# Altium PCB FC_Ver_0_2.PcbDoc
Units mil, origin at the board's own origin, x right, y up, seen from the top; angles counter-clockwise.
Board outline 2440.94 x 3464.57 mil, 2 copper layers (Top Layer, Bottom Layer); 26 components, 24 nets, 114 pads, 10 vias.
Unrouted connection lines stored in the file: 33.
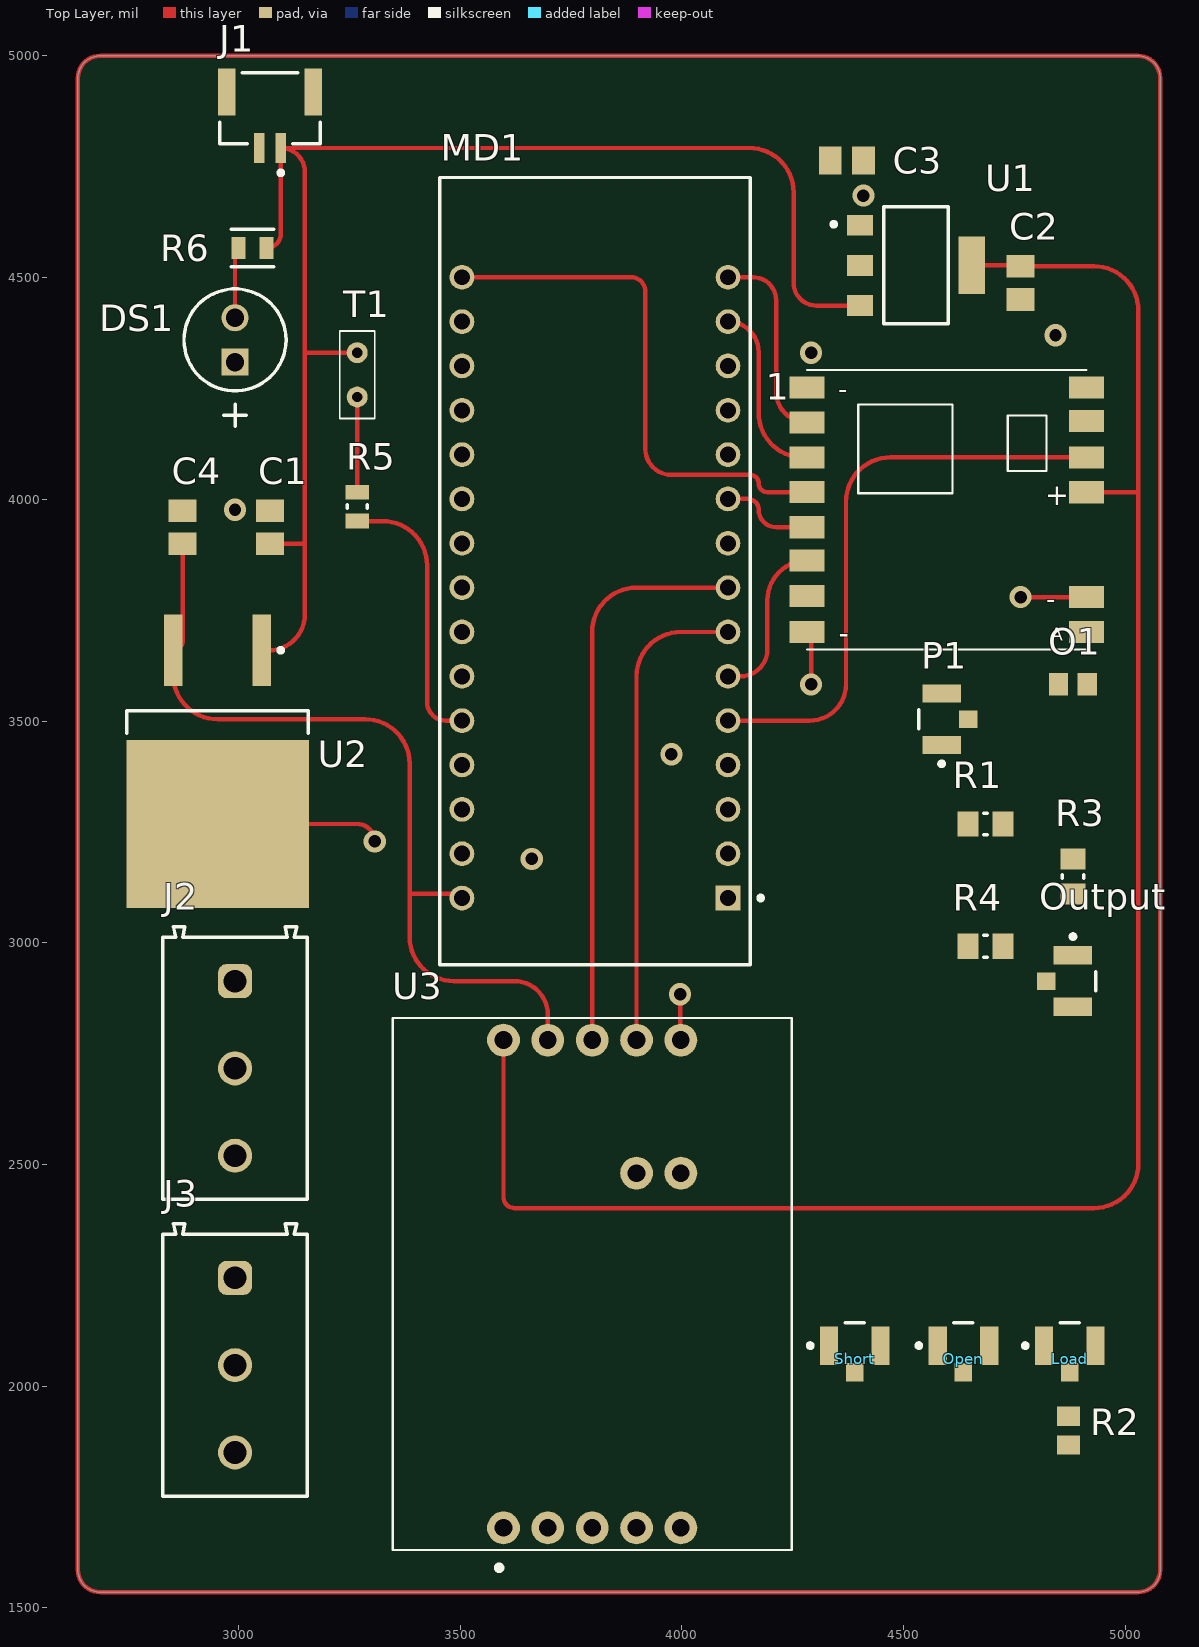
[diagram p0: Top Layer view]
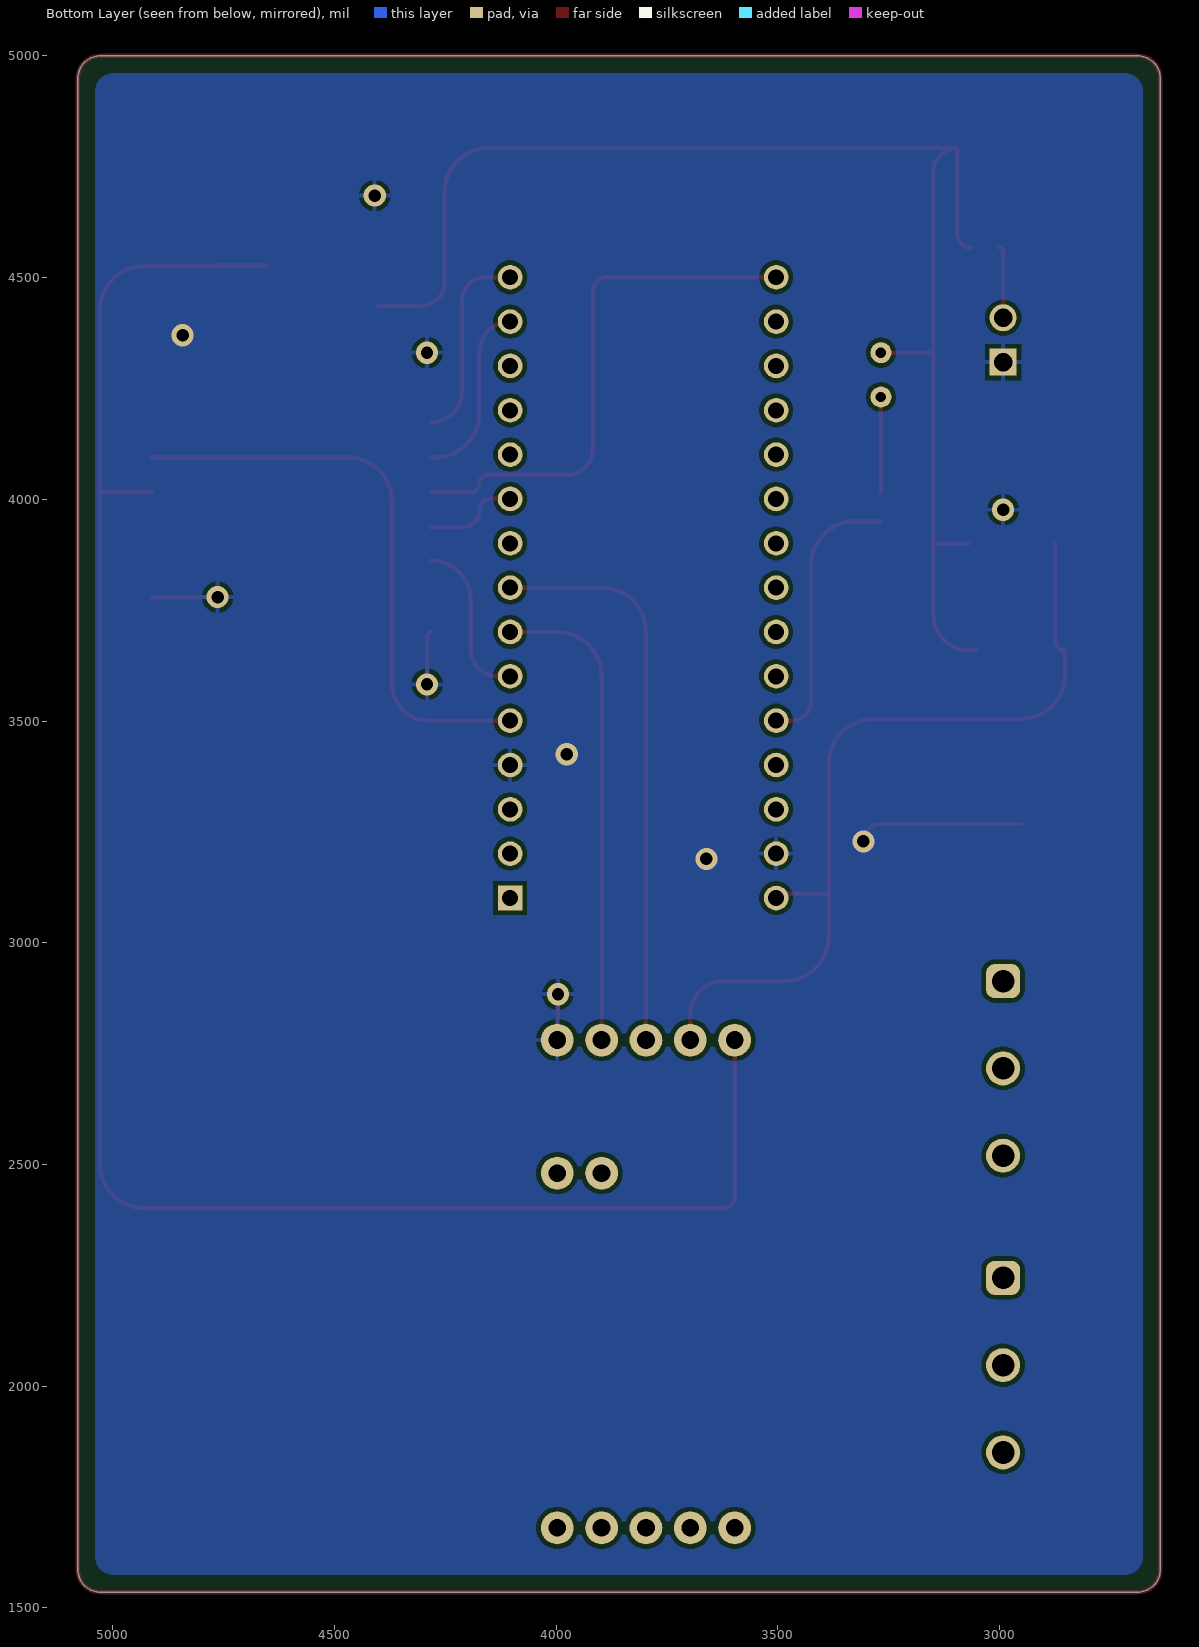
[diagram p1: Bottom Layer view, seen from below]

## Layer stack, top to bottom
Top Solder: solder mask 0.4, Solder Resist, Dk 3.5
Top Layer: signal copper 1.4
Dielectric 1: dielectric 12.6, FR-4, Dk 4.8
Bottom Layer: signal copper 1.4
Bottom Solder: solder mask 0.4, Solder Resist, Dk 3.5

## Board outline
2637.8,1585.43 ccw(c2687.8,1585.43) 2687.8,1535.43 5028.74,1535.43 ccw(c5028.74,1585.43) 5078.74,1585.43 5078.74,4950 ccw(c5028.74,4950) 5028.74,5000 2687.8,5000 ccw(c2687.8,4950) 2637.8,4950

## Design rules (kind name [scope] priority, off if disabled: settings)
Clearance [All] p1: gap=10 ignorepadtopadclearanceinfootprint=FALSE
PolygonConnect [All] p1: connectstyle=Relief reliefconductorwidth=10 reliefentries=4 polygonreliefangle="90 Angle" airgapwidth=10
RoutingVias [All] p1: holewidth=28 width=50 viastyle="Through Hole" minholewidth=28 minwidth=50 maxholewidth=28 maxwidth=50
SolderMaskExpansion [All] p1: expansion=4 istentingtop=FALSE
SupplyNets "Schematic Supply Nets_3" [InNet('+3.3v')] p1: voltage=0.000
SupplyNets "Schematic Supply Nets_2" [InNet('+12')] p2: voltage=0.000
SupplyNets "Schematic Supply Nets_1" [InNet('+5v')] p3: voltage=0.000
SupplyNets "Schematic Supply Nets" [InNet('GND')] p4: voltage=0.000
Width [All] p1: maxlimit=10 minlimit=10 preferedwidth=10
30 further rules are at their usual default settings.

## Components (designator, comment, footprint, x,y, rotation, side; value= is the part's Value field where it differs from the comment)
1 "_C2H_RFM95" _C2H_RFM95 4685.04,3976.38 r0 top
C1 "100nF" RCL_M0805 3070.87,3937.01 r270 top
C2 "10uF" RCL_M0805 4763.78,4488.19 r90 top
C3 "0.33uF" RCL_M0805 4372.05,4763.78 r0 top
C4 "0.1uF" RCL_M0805 2874.02,3937.01 r90 top
DS1 "HLMP-3301" AVAG-HLMP-3301-2 2992.13,4309.45 r90 top
J1 "SM02B-GHS-TB(LF)(SN)" FP-SM02B-GHS-TB_LF_SN-MFG 3070.87,4881.89 r180 top
J2 "691213710003" 691213710003 2992.13,2716.54 r270 top
J3 "691213710003" 691213710003 2992.13,2047.24 r270 top
Load "Load" HRS-U.FL-R-SMT-3_V 4874.76,2091.34 r0 top
MD1 "A000005" FP-A000005-MFG 3803.94,3838.29 r180 top
O1 "0805" RESC2012X06N 4881.89,3582.68 r0 top
Open "Open" HRS-U.FL-R-SMT-3_V 4634.76,2091.34 r0 top
Output "U.FL-R-SMT-1(01)" HRS-U.FL-R-SMT-3_V 4881.89,2913.39 r270 top
P1 "Tune Side" HRS-U.FL-R-SMT-3_V 4585.63,3503.94 r90 top
R1 "RC0805FR-071KL" RESC2013X60X35ML10T20 4685.04,3267.72 r0 top
R2 "0805" RESC2012X06N 4872.05,1899.61 r90 top
R3 "RC0805FR-071KL" RESC2013X60X35ML10T20 4881.89,3149.61 r90 top
R4 "RC0805FR-071KL" RESC2013X60X35ML10T20 4685.04,2992.13 r0 top
R5 "CRCW08050000Z0EA" RESC2013X50X30LL20T20 3267.72,3983.27 r90 top
R6 "RC0805FR-07100KL" FP-RC0805-0_6-IPC_C 3031.5,4566.93 r180 top
Short "Short" HRS-U.FL-R-SMT-3_V 4389.76,2091.34 r0 top
T1 "GenericTH" "Generic Two Pin Connector" 3267.72,4330.71 r270 top
U1 "LD1117S33CTR" FP-SOT-223-0046067_14-MFG 4527.56,4527.56 r0 top
U2 "L7805CD2T-TR" TO-263_M 2952.76,3409.45 r270 top
U3 "SEN-13879" SPARKFUN_SEN-13879 3797.64,2230.32 r90 top

## Footprints (in the part's own frame and the unit in brackets; to place one, negate y for a bottom-side part, rotate by r counter-clockwise, add the part's x,y. Pads: shape width x height; smd on the part's side, far side on the other; paste and mask are expansions set on the pad)
691213710003 [mm] "5,00mm - modular - green - Horizontal entry with rising cage clamp -  10,0mm height - 03p"
  rrect50% 1.95x1.95 hole 1.3: 1(-5,0)
  round 1.95 hole 1.3: 2(0,0) 3(5,0)
  silkscreen extent -8.1,-4.15 7.5,4.15, body extent -8.1,-4.15 7.5,4.15, height 10.05
_C2H_RFM95 [mm]
  rect 2x1.27 smd: ANT(5.777,-7) DIO0(5.777,3) DIO1(5.78,5.095) DIO2(5.78,7) DIO5(-10.225,-4.936) GND(5.777,-5) GND1(-10.222,7) GND2(-10.23,-7) MISO(-10.23,5) MOSI(-10.225,3) NSS(-10.222,-1) RST(-10.222,-2.905) SCK(-10.23,1.012) VDD(5.777,1)
  silkscreen extent -10.23,-8 5.78,8
AVAG-HLMP-3301-2 [mm] "THD, 2-Leads, Body Dia 5.85mm"
  rect 1.55x1.55 hole 1.05: 1(0,0)
  round 1.55 hole 1.05: 2(2.54,0)
  silkscreen extent -3.68,-2.92 4.19,2.92
FP-A000005-MFG [mil]
  rect 55.67x55.67 hole 35.98 paste-99999 mask+0: 1(-300,737.5)
  round 55.67 hole 35.98 paste-99999 mask+0: 2(-300,637.5) 3(-300,537.5) 4(-300,437.5) 5(-300,337.5) 6(-300,237.5) 7(-300,137.5) 8(-300,37.5) 9(-300,-62.5) 10(-300,-162.5) 11(-300,-262.5) 12(-300,-362.5) 13(-300,-462.5) 14(-300,-562.5) 15(-300,-662.5) 16(300,-662.5) 17(300,-562.5) 18(300,-462.5) 19(300,-362.5) 20(300,-262.5) 21(300,-162.5) 22(300,-62.5) 23(300,37.5) 24(300,137.5) 25(300,237.5) 26(300,337.5) 27(300,437.5) 28(300,537.5) 29(300,637.5) 30(300,737.5)
  silkscreen extent -379,-888 350,888, body extent -354,-891 354,891, height 10
FP-RC0805-0_6-IPC_C [mil]
  rect 31.82x49.69 smd paste+0 mask+0: 1(-31.57,0) 2(31.57,0)
  silkscreen extent -47,-42 47,42, body extent -51,-31 51,31, height 10
FP-SM02B-GHS-TB_LF_SN-MFG [mm]
  rect 0.6x1.7 smd paste+0 mask+0: 1(-0.625,2.275) 2(0.625,2.275)
  rect 1x2.7 smd paste+0 mask+0: 3(-2.475,-0.925) 4(2.475,-0.925)
  silkscreen extent -2.88,-2.02 2.88,3.82, body extent -3.08,-2.37 3.08,3.22, height 0.25
FP-SOT-223-0046067_14-MFG [mm]
  rect 1.5x1.2 smd paste+0 mask+0: 1(-3.2,2.3) 2(-3.2,0) 3(-3.2,-2.3)
  rect 1.5x3.3 smd paste+0 mask+0: 4(3.2,0)
  silkscreen extent -4.82,-3.35 1.85,3.35, body extent -4.05,-3.45 4.05,3.45, height 0.25
"Generic Two Pin Connector" [mm]
  round 1.2 hole 0.6: 1(0,0) 2(2.54,0)
  silkscreen extent -1.23,-1 3.77,1
HRS-U.FL-R-SMT-3_V [mm] "SMT, 3-Leads, Body 2.6x2.6mm"
  rect 1.05x2.2 smd: 1(-1.475,0) 2(1.475,0)
  rect 1x1.05 smd: 3(0,-1.525)
  silkscreen extent -2.67,-0.12 0.55,1.3, body extent -1.3,-1.3 1.3,1.3, height 1.25
RCL_M0805 [mil]
  rect 51.18x62.99 smd: 1(-37.4,0) 2(37.4,0)
RESC2012X06N [mm] "Chip Resistor, 2-Leads, Body 2.00x1.25mm, IPC Medium Density"
  rect 1.1x1.3 smd: 1(-0.825,0) 2(0.825,0)
  body extent -1,-0.63 1,0.63, height 0.6
RESC2013X50X30LL20T20 [mm] "Chip Resistor, 2-Leads, Body 2.00x1.25mm, IPC High Density"
  rect 0.85x1.35 smd: 1(-0.825,0) 2(0.825,0)
  silkscreen extent -0.1,-0.58 0.1,0.58, body extent -1.1,-0.72 1.1,0.72, height 0.5
RESC2013X60X35ML10T20 [mm] "Chip Resistor, 2-Leads, Body 2.1x1.35mm, IPC Low Density"
  rect 1.2x1.45 smd: 1(-1,0) 2(1,0)
  silkscreen extent -0.1,-0.63 0.1,0.63, body extent -1.05,-0.68 1.05,0.67, height 0.6
SPARKFUN_SEN-13879 [mil]
  round 74 hole 40: 1(-550,200) 2(-550,100) 3(-550,0) 4(-550,-100) 5(-550,-200) 6(550,-200) 7(550,-100) 8(550,0) 9(550,100) 10(550,200) 11(250,-100) 12(250,-200)
  silkscreen extent -646,-450 600,450
TO-263_M [mm] "D2-PAK, 4-Leads, Body 9.2x10.2mm, Pitch 2.54mm, Lead Span 15.4mm, IPC Low Density"
  rect 4.1x1.05 smd: 1(-6.35,2.54) 3(-6.35,-2.54)
  rect 9.6x10.45 smd: 4(3.6,0)
  silkscreen extent -6.47,-5.2 -1.6,5.2, body extent -2.9,-5.2 6.45,5.2, height 4.6

## Part data
C1 C2 C3 C4: library part RCL_R-EU_M0805, Package=RCL_M0805, DeviceName=M0805, DeviceSetName=RCL_R-EU_, GateName_1=G$1, LibraryName=AmbaSat-1v1-01-NO-solar, SymbolName_1=RCL_R-EU
DS1: library part CMP-2000-06411-1, "T-1 3/4 (5 mm) Diffused LED Lamp, 1.9 V, -40 to 100 degC, 2-Pin THD, RoHS, Bulk", Emitting Color=Red, Forward Current=25mA, Forward Voltage=2.4V, Manufacturer=Avago, Operating Temp Range=-40Cto100C, Operating Temperature Classification=Industrial, Package Description="2-Pin Through Hole LED, Dia 5.85 mm", Package Type=T-13/4, Power Dissipation=85W, Reverse Voltage=5V, Test Current (It)=10mA, Chip Material=GaP, Datasheet URL=http://www.avagotech.com/docs/AV02-1558EN, Datasheet Version=03/2015, DELETED=Compliant, Dominant Wave Length=626nm, High Brightness=No, Lens Dimensions=5.08x5.08x8.3mm, Lens Type=ColoredDiffused, Lum Intensity=5.4mcd, Luminous Intensity=5.4mcd, Main Category=StandardLED, Manufacturer URL=http://www.avagotech.com/, Mounting=ThroughHole, Mounting Technology=ThroughHole, Number of  Elements=1, Package Reference=HLMP-3301, Packaging=TapeandReel, Peak Wavelength=635nm, Pin Count=2, Product Depth (mm)=6.1mm, Product Height (mm)=9.19mm, Product Length (mm)=6.1mm, Rad Hardened=No, Shape Type=Circular, Type=Uni-Color, Viewing Angle=60deg
J1: library part CMP-2000-07076-2, "CONN HEADER SMD R/A 2POS 1.25MM", Color=Natural, Current Rating=1A, Package Quantity=2500, Voltage Rating=50V, Connector Type="Outer Shroud Contact", Contact Material=Bronze, Contact Plating=Tin, Contact Type="Male Pin", Fastening Type=Latch, Housing Color=Natural, Housing Material=Nylon, Lead Free="Lead Free", Mount="Surface Mount", Number of Contacts=2, Number of Positions=2, Number of Rows=1, Orientation="Right Angle", Packaging="Tape and Reel", Pitch=0.049inch, Series=GH, Termination=Solder
J2 J3: library part CMP-1502-02527-2, Color=Green, Current=10A, Max Operating Temperature=105°C, Min Operating Temperature=-40°C, Voltage=300V, Connector Type="PCB, Terminal Block", Contact Material=Brass, Contact Plating=Tin, Height=10mm, Housing Material=Nylon, Lead Pitch=5mm, Length=8.3mm, Mount="Through Hole", NexarPartId=8917719, Number of Contacts=3, Number of Levels=1, Number of Pins=3, Number of Positions Per Level=3, Packaging=Box, Pitch=5.0038mm, Plating="Brass, Steel", REACH SVHC=Unknown, RoHS=Compliant, Stripping Length=-7mm, Termination=Screw, Width=15.6mm, Wire Gauge (Max)=26AWG, Wire Gauge (Min)=16AWG, Wire/Cable Gauge=16AWG
Load Open Output P1 Short: library part CMP-2000-05153-1, "Ultra Small Coaxial Connector, 6 GHz, -40 to 90 degC, 3-Pin SMD, RoHS, Bulk", Dielectric Material=LiquidCrystalPolymer(LCP), Frequency - Max=6GHz, Housing Color=Silver, Manufacturer="Hirose Electric", Operating Temperature=-40degC~90degC, Package Description="3-Pin Surface Mount Device, Body 2.6 x 2.6 mm", Package Reference=U.FL-R-SMT, Standard Package=100, Body Finish=Silver, Body Material=PhosphorBronze, Category=Connectors,Interconnects, Center Contact Material=PhosphorBronze, Center Contact Plating=Gold, Connector Style=U.FL, Connector Type=Jack,MalePin, Contact Termination=Solder, Datasheet URL=https://datasheet.ciiva.com/26945/getdatasheetpartid-475239-26945414.pdf, Datasheet Version=Feb-09, Dynamic Catalog=U.FLSeries, Family=CoaxialConnectors(RF), Fastening Type=Snap-On, Featured Product=HiroseU.FLSeries, Impedance=50Ohm, Manufacturer URL=https://www.hirose.com, Minimum Quantity=UltraMiniatureCoaxial, Mounting Type=SurfaceMount, Online Catalog=U.FLSeries, Other Names="H122041 / U.FL-R-SMT-1(01)-ND", Packaging=Bulk, Quantity Available=Bulk, Series=U.FL, Shield Termination=Solder, Unit PriceUSD=U.FL
MD1: library part CMP-189986-000002-1, "ARDUINO NANO ATMEGA328 EVAL BRD", Operating Supply Voltage=12V, Package Quantity=50, Core Architecture=AVR, Data Bus Width=8b, Evaluation Kit=Yes, Height=0.25inch, Interface=I2C, Length=7inch, Number of Bits=8, Packaging=Bulk, REACH SVHC="No SVHC", Series="AVR® ATmega", Weight=0.358383oz, Width=5inch
R1 R3 R4: library part CMP-2100-03671-1, "Chip Resistor, 1 KOhm, +/- 1%, 125 mW, -55 to 155 degC, 0805 (2012 Metric), RoHS, Tape and Reel", Case Code (Imperial)=0805, Case Code (Metric)=2012, Manufacturer=Yageo, Max Operating Temperature=155degC, Max Power Dissipation=125mW, Min Operating Temperature=-55degC, Package Description="2-Pin Surface Mounted Device, Body 2 x 1.25 mm", Package Quantity=1, Resistance=1KOhm, Temperature Coefficient=100ppm/degreesC, Tolerance=1%, Voltage Rating=150V, Case/Package=0805, Composition=ThickFilm, Datasheet URL=http://www.yageo.com/NewPortal/yageodocoutput?fileName=/pdf/R-Chip/PYu-RC_Group_51_RoHS_L_5.pdf, Datasheet Version="Rev. 5, 10/2016", Depth=1.25mm, Height=0.024inch, Lead Free=LeadFree, Length=0.079inch, Manufacturer URL=http://www.yageo.com/, Military Standard=Not, Number of Pins=2, Number of Terminations=2, Package Reference=0805, Packaging=TapeandReel, Power Rating=125mW, REACH SVHC=Unknown, RoHSCompliant=true, Termination=SMD/SMT, Voltage Rating (DC)=150V, Width=0.049inch
R5: library part CMP-2001-04896-1, Manufacturer="Vishay Dale", Part Number=CRCW08050000Z0EA
R6: library part CMP-2100-03668-5, "RES 100K OHM 1% 1/8W 0805", Case Code (Imperial)=0805, Case Code (Metric)=2012, Max Operating Temperature=155°C, Max Power Dissipation=125mW, Min Operating Temperature=-55°C, Package Quantity=1, Resistance=100kR, Resistance Tolerance=1%, Resistor Type="Thick Film", Temperature Coefficient=100ppm/°C, Voltage Rating=150V, Case/Package=0805, Construction=Rectangular, Depth=1.25mm, Features="Moisture Resistant", Height=0.024inch, Lead Free="Lead Free", Lead Pitch=0.4mm, Length=0.079inch, Military Standard=Not, Number of Pins=2, Number of Terminations=2, Packaging="Tape and Reel", Power Rating=125mW, RoHS Compliant=Yes, Series=RC, Size Code=0805, Technology="THICK FILM", Termination=SMD/SMT, Tolerance=1%, Voltage Rating (DC)=150V, Width=0.049inch
T1: library part "Generic Through Hole"
U1: library part CMP-0244-00307-2, "IC REG LINEAR 3.3V 800MA SOT223", Case/Package=SOT-223, Dropout Voltage=1.1V, Input Bias Current=5mA, Max Input Voltage=15V, Max Operating Temperature=125°C, Max Output Current=1.3A, Max Output Voltage=3.3V, Max Power Dissipation=12W, Min Input Voltage=5.3V, Min Operating Temperature=-40°C, Output Current=950mA, Output Voltage Accuracy=1%, Package Quantity=1, Quiescent Current=10mA, Accuracy=1%, Contact Plating=Tin, Height=1.8mm, Lead Free="Lead Free", Length=6.5mm, Max Supply Voltage=15V, Min Output Voltage=3.3V, Min Supply Voltage=3.3V, Mount="Surface Mount", Nominal Output Voltage=3.3V, Number of Outputs=1, Number of Pins=4, Number of Regulators=1, Number of Terminals=4, Output Type=Fixed, Output Voltage=3.3V, Packaging="Tape and Reel", Polarity=Positive, Power Dissipation=12W, Radiation Hardening=No, REACH SVHC="No SVHC", Termination=SMD/SMT, Weight=0.01lb, Width=3.5mm
U2: library part CMP-0244-00213-1, "Positive Voltage Regulator, 3-Pin D2PAK, Tape and Reel", ComponentLink1Description="Manufacturer URL", ComponentLink1URL=http://www.st.com, ComponentLink2Description=Datasheet, ComponentLink2URL=http://www.st.com/internet/com/TECHNICAL_RESOURCES/TECHNICAL_LITERATURE/DATASHEET/CD00000444.pdf, DatasheetVersion=16/11/2011, PackageDescription="3-Pin Transistor Outline Package 2.54 mm Pitch, 15.4 mm Lead Span (D2PAK)", PackageReference=TO-263, PackageVersion=2011
U3: "Load Cell Amp Hx711", Package=None, Availability=Unavailable, MP=SEN-13879, Price=None
1: DeviceSetName=_C2H_RFM95, GateName_1=G$1, LibraryName=AmbaSat-1v1-01-NO-solar, Package=_C2H_RFM95, SymbolName_1=_C2H_RFM95

## Via types
v1: diameter 50, hole 28, Top Layer to Bottom Layer, 10 vias

## Nets (pads, with @x,y where several pads share a name; then routed paths per layer and width w, separated by ;. In a path a pad name is that pad's centre, name@x,y a point inside that pad or via, vN(x,y) a via of type N, cw(c..) or ccw(c..) an arc to the next point about the centre after c; other vN are vias at no path point)
+3.3v: 1.VDD C2.2 U1.2 U1.4 U3.10 | length 4332.5
  Top Layer w10: U3.10 3597.64,2425.98 ccw(c3622.05,2425.98) 3622.05,2401.57 4929.53,2401.57 ccw(c4929.53,2501.57) 5029.53,2501.57 5029.53,4015.75 ; U1.4 4761.81,4527.56 cw(c4761.81,4525.59) C2.2 4929.53,4525.59 cw(c4929.53,4425.59) 5029.53,4425.59 5029.53,4015.75 ; 1.VDD 5029.53,4015.75
+5v: C4.1 MD1.30 U2.3 U3.9 | length 1966.2
  Top Layer w10: C4.1 2874.02,3680.71 cw(c2852.76,3680.71) U2.3 2852.76,3603.94 ccw(c2952.76,3603.94) 2952.76,3503.94 3285.83,3503.94 cw(c3285.83,3403.94) 3385.83,3403.94 3385.83,3110.24 ; MD1.30 ccw(c3494.49,3100.79) 3494.49,3110.24 3385.83,3110.24 ; U3.9@3697.64,2752.76 U3.9 3697.64,2837.8 ccw(c3622.05,2837.8) 3622.05,2913.39 3485.83,2913.39 cw(c3485.83,3013.39) 3385.83,3013.39 3385.83,3110.24
+12: C1.2 C3.1 J1.1 R6.1 T1.1 U1.3 U2.1 | length 3264.4
  Top Layer w10: U2.1 3068.9,3659.45 ccw(c3068.9,3740.16) 3149.61,3740.16 3149.61,3897.64 ; R6.1 ccw(c3063.07,4599.33) 3095.47,4599.33 J1.1 ; C1.2 3147.64,3899.61 cw(c3147.64,3897.64) 3149.61,3897.64 ; T1.1 3149.61,4330.71 ; U1.3 4303.15,4437.01 cw(c4303.15,4488.19) 4251.97,4488.19 4251.97,4692.32 ccw(c4151.97,4692.32) 4151.97,4792.32 J1.1 ; J1.1 cw(c3095.47,4738.19) 3149.61,4738.19 3149.61,4330.71 ; 3149.61,3897.64 3149.61,4330.71
ANT: 1.ANT O1.2
BLK: J2.2 U3.2
CLK: MD1.7 U3.7 | length 1083.9
  Top Layer w10: U3.7 3897.64,3600.79 cw(c3997.64,3600.79) 3997.64,3700.79 MD1.7
CS: 1.NSS MD1.10 | length 215
  Top Layer w10: MD1.10 4148.82,4000.79 cw(c4148.82,3976.38) 4173.23,3976.38 ccw(c4212.6,3976.38) 4212.6,3937.01 1.NSS
DAT: MD1.8 U3.8 | length 1283.9
  Top Layer w10: U3.8 3797.64,3700.79 cw(c3897.64,3700.79) 3897.64,3800.79 MD1.8
DIO0: 1.DIO0 MD1.5 | length 1324.2
  Top Layer w10: MD1.5 4288.19,3500.79 ccw(c4288.19,3582.68) 4370.08,3582.68 4370.08,3994.49 cw(c4470.08,3994.49) 4470.08,4094.49 1.DIO0
GND: 1.GND 1.GND1 1.GND2 C1.1 C2.1 C3.2 C4.2 DS1.1 J1.2 Load.1 Load.2 MD1.4 MD1.29 Output.1 Output.2 P1.1 P1.2 R1.2 R2.1 R4.1 Short.1 Short.2 Short.3 U1.1 U2.4 U3.6 | length 753.2
  Top Layer w10: U2.4 3267.72,3267.72 cw(c3267.72,3228.35) v1(3307.09,3228.35) ; v1(3996.06,2883.86) 3996.06,2781.89 ccw(c3997.64,2781.89) U3.6 ; 1.GND2 cw(c4282.28,3691.73) 4291.34,3691.73 v1(4291.34,3582.68) ; v1(4763.78,3779.53) 1.GND
  other v1: 3661.42,3188.98 3976.38,3425.2 2992.13,3976.38 4291.34,4330.71 4842.52,4370.08 4409.45,4685.04
GRN: J3.2 U3.4
MISO: 1.MISO MD1.15 | length 453.7
  Top Layer w10: MD1.15 4160.63,4500.79 cw(c4160.63,4448.82) 4212.6,4448.82 4212.6,4242.91 ccw(c4282.28,4242.91) 1.MISO
MOSI: 1.MOSI MD1.14 | length 412.2
  Top Layer w10: MD1.14 cw(c4103.94,4331.5) 4173.23,4331.5 4173.23,4194.49 ccw(c4273.23,4194.49) 4273.23,4094.49 1.MOSI
NetDS1_2: DS1.2 R6.2 | length 161.9
  Top Layer w10: DS1.2 2992.13,4559.13 cw(c2999.92,4559.13) R6.2
NetLoad_3: Load.3 R2.2
NetMD1_26: MD1.26 R5.1 | length 625.1
  Top Layer w10: R5.1 3325.2,3950.79 cw(c3325.2,3850.79) 3425.2,3850.79 3425.2,3543.31 ccw(c3467.72,3543.31) 3467.72,3500.79 MD1.26
NetO1_1: O1.1 P1.3 R1.1 R3.2
NetOutput_3: Output.3 R3.1 R4.2
NetR5_2: R5.2 T1.2 | length 215
  Top Layer w10: R5.2 T1.2
RED: J2.3 U3.1
RST: 1.RST MD1.6 | length 375.4
  Top Layer w10: MD1.6 4132.28,3600.79 ccw(c4132.28,3661.42) 4192.91,3661.42 4192.91,3772.34 cw(c4282.58,3772.34) 1.RST
SCK: 1.SCK MD1.16 | length 1207
  Top Layer w10: MD1.16 3885.04,4500.79 cw(c3885.04,4468.5) 3917.32,4468.5 3917.32,4114.17 ccw(c3976.38,4114.17) 3976.38,4055.12 4153.54,4055.12 cw(c4153.54,4035.43) 4173.23,4035.43 ccw(c4192.43,4035.43) 4192.43,4016.23 1.SCK
WHT: J2.1 U3.3
YEL: J3.1 U3.5
pads on no net: 1.DIO1 1.DIO2 1.DIO5 J1.3 J1.4 J3.3 MD1.1 MD1.2 MD1.3 MD1.9 MD1.11 MD1.12 MD1.13 MD1.17 MD1.18 MD1.19 MD1.20 MD1.21 MD1.22 MD1.23 MD1.24 MD1.25 MD1.27 MD1.28 Open.1 Open.2 Open.3 U3.11 U3.12
copper on no net: | length 11725.2
  Top Layer w10: 2637.8,1585.43 ccw(c2687.8,1585.43) 2687.8,1535.43 5028.74,1535.43 ccw(c5028.74,1585.43) 5078.74,1585.43 5078.74,4950 ccw(c5028.74,4950) 5028.74,5000 2687.8,5000 ccw(c2687.8,4950) 2637.8,4950 2637.8,1585.43

## Polygon pours and split planes (outlines as drawn)
GND on Bottom Layer "GND_L02_P000" (solid, pour order 0): 2716.54,1574.8 cw(c2716.54,1614.17) 2677.17,1614.17 2677.17,4921.26 cw(c2716.54,4921.26) 2716.54,4960.63 5000,4960.63 cw(c5000,4921.26) 5039.37,4921.26 5039.37,1614.17 cw(c5000,1614.17) 5000,1574.8

## Text inside footprints (layer, text, board x,y; h text height)
1: Top Overlay "-" at 4353.04,4228.38 h42.5; Top Overlay "-" at 4353.54,3675.88 h46.75; Top Overlay "-" at 4821.46,3754.37 h42.5; Top Overlay "A" at 4831.95,3680.99 h29.75; Top Overlay "+" at 4818.96,3986.87 h46.75